# Altium PCB touch_control_165.PcbDoc
Units mm, origin at the board's own origin, x right, y up, seen from the top; angles counter-clockwise.
Board outline 165 x 20 mm, 4 copper layers (Top Layer, Int1 (Guard), Int2 (PWR), Bottom Layer), stack 1.573 mm thick; 25 components, 27 nets, 112 pads, 77 vias.
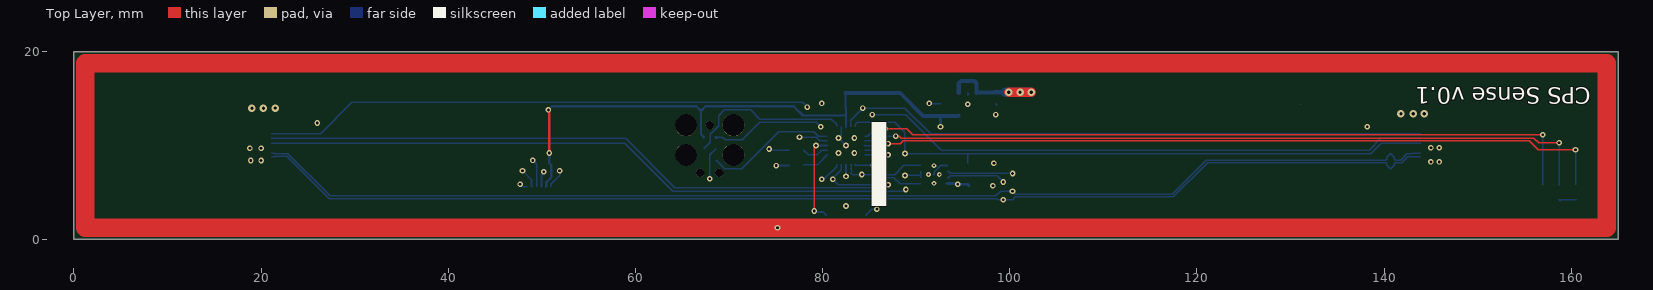
[diagram p0: Top Layer view]
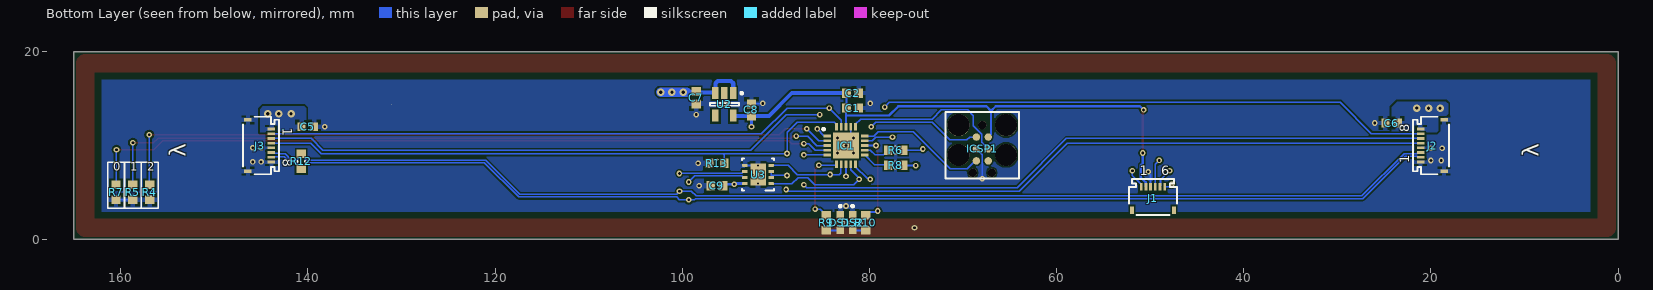
[diagram p1: Bottom Layer view, seen from below]
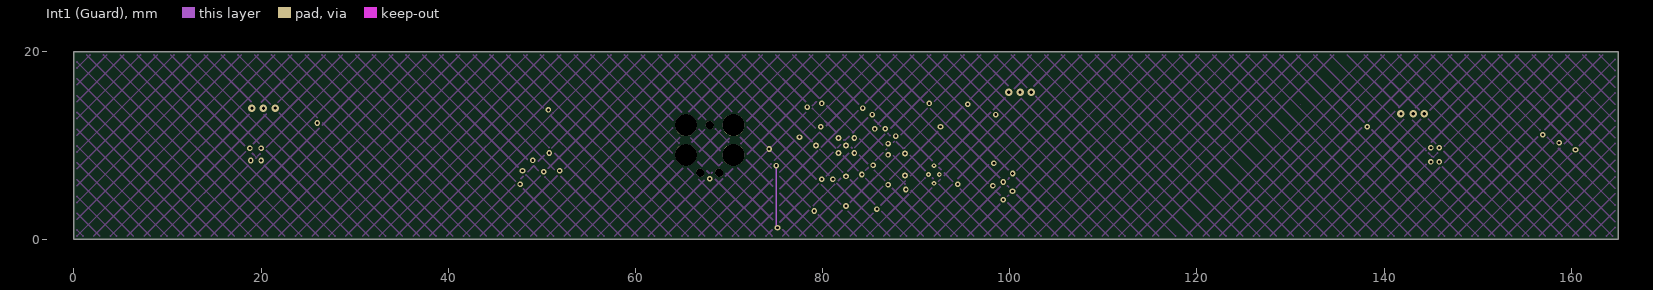
[diagram p2: Int1 (Guard)]
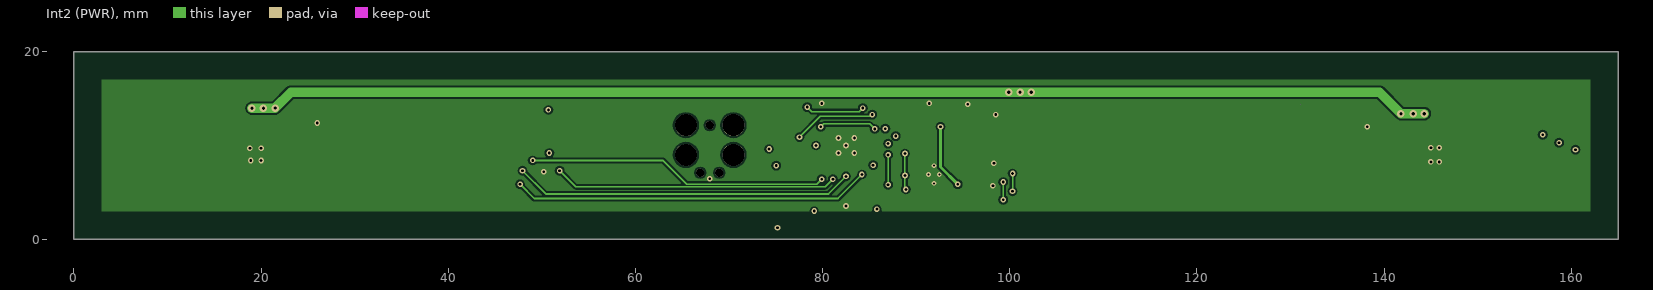
[diagram p3: Int2 (PWR)]

## Layer stack, top to bottom
Top Solder: solder mask 0.0254, SM-001, Dk 4
Top Layer: signal copper 0.035
Dielectric 1: prepreg 0.1803, PP-021, Dk 4.7
Dielectric 2: prepreg 0.1803, PP-021, Dk 4.7
Int1 (Guard): signal copper 0.035
Dielectric 3: core 0.7112, Core-039, Dk 4.8
Int2 (PWR): signal copper 0.035
Dielectric 4: prepreg 0.1803, PP-021, Dk 4.7
Dielectric 5: prepreg 0.1803, PP-021, Dk 4.7
Bottom Layer: signal copper 0.035
Bottom Solder: solder mask 0.0254, SM-001, Dk 4

## Board outline
0,0 165,0 165,20 0,20
cut-out: 131.1,14.4

## Design rules (kind name [scope] priority, off if disabled: settings)
BoardOutlineClearance [All] p1: gap=0.2 ignorepadtopadclearanceinfootprint=FALSE except(0.4: Arc-SplitBarrior Arc-SplitContinuation Track-SplitBarrior Track-SplitContinuation SMDPad-SplitBarrior SMDPad-SplitContinuation THPad-SplitBarrior THPad-SplitContinuation Via-SplitBarrior Via-SplitContinuation Fill-SplitBarrior Fill-SplitContinuation Poly-SplitBarrior Poly-SplitContinuation Region-SplitBarrior Region-SplitContinuation Text-SplitBarrior Text-SplitContinuation)
Clearance Clearance_1 [All] p1: gap=0.2 ignorepadtopadclearanceinfootprint=TRUE except(0.089: Arc-Arc Arc-Track Arc-SMDPad Track-Track Track-SMDPad SMDPad-SMDPad; 0.254: Arc-Text Track-Text SMDPad-Text THPad-Text Via-Text Fill-Text Poly-Text Region-Text Text-Text)
DiffPairsRouting RS485 [InDifferentialPair('RS485')] p1: maxlimit=0.127 minlimit=0.127 mostfreqgap=0.127 toplayer_minwidth=0.157 toplayer_maxwidth=0.589 toplayer_prefwidth=0.157 midlayer1_minwidth=0.063 midlayer1_maxwidth=0.343 midlayer1_prefwidth=0.063 midlayer2_minwidth=0.063 midlayer2_maxwidth=0.343 midlayer2_prefwidth=0.063 bottomlayer_minwidth=0.157 bottomlayer_maxwidth=0.589 bottomlayer_prefwidth=0.157 impedanceprofiledriven=TRUE impedanceprofileid={A137A21B-FC63-43BB-B182-D2C5AB81EC2A} impedanceprofilevalue=100.000000 maxuncoupledlength=12.7
DiffPairsRouting [All] p2: maxlimit=0.254 minlimit=0.254 mostfreqgap=0.254 toplayer_minwidth=0.381 toplayer_maxwidth=0.381 toplayer_prefwidth=0.381 midlayer1_minwidth=0.381 midlayer1_maxwidth=0.381 midlayer1_prefwidth=0.381 midlayer2_minwidth=0.381 midlayer2_maxwidth=0.381 midlayer2_prefwidth=0.381 bottomlayer_minwidth=0.381 bottomlayer_maxwidth=0.381 bottomlayer_prefwidth=0.381 maxuncoupledlength=12.7
HoleSize [All] p1: absolutevalues=TRUE maxlimit=6.3 minlimit=0.2 maxpercent=80.000 minpercent=20.000
MinimumAnnularRing [All] p1: minimumring=0.076
MinimumSolderMaskSliver [All] p1: minsoldermaskwidth=0.1
PlaneConnect [All] p1: pad.planeconnectstyle=Relief pad.reliefexpansion=0.508 pad.reliefentries=4 pad.reliefconductorwidth=0.254 pad.reliefairgap=0.254 via.planeconnectstyle=Direct via.reliefexpansion=0.508 via.reliefentries=4 via.reliefconductorwidth=0.254 via.reliefairgap=0.254
PolygonConnect PolygonConnect_2 [InNet('GND') vs InNet('GND')] p1 off: thpad.connectstyle=Relief thpad.reliefconductorwidth=0.254 thpad.reliefentries=4 thpad.polygonreliefangle="90 Angle" thpad.airgapwidth=0.254 smdpad.connectstyle=Direct smdpad.reliefconductorwidth=0.254 smdpad.reliefentries=4 smdpad.polygonreliefangle="90 Angle" smdpad.airgapwidth=0.254 via.connectstyle=Direct via.reliefconductorwidth=0.254 via.reliefentries=4 via.polygonreliefangle="90 Angle" via.airgapwidth=0.254
PolygonConnect PolygonConnect_1 [All] p2: thpad.connectstyle=Relief thpad.reliefconductorwidth=0.508 thpad.reliefentries=4 thpad.polygonreliefangle="90 Angle" thpad.airgapwidth=0.254 smdpad.connectstyle=Relief smdpad.reliefconductorwidth=0.508 smdpad.reliefentries=4 smdpad.polygonreliefangle="90 Angle" smdpad.airgapwidth=0.254 via.connectstyle=Direct via.reliefconductorwidth=0.508 via.reliefentries=4 via.polygonreliefangle="90 Angle" via.airgapwidth=0.254
PolygonConnect [All] p3: connectstyle=Relief reliefconductorwidth=0.254 reliefentries=4 polygonreliefangle="90 Angle" airgapwidth=0.254
RoutingCorners [All] p1: cornerstyle=Round minsetback=2.54 maxsetback=2.54
RoutingVias [All] p1: holewidth=0.5 width=1 viastyle="Through Hole" minholewidth=0.2 minwidth=0.45 maxholewidth=1 maxwidth=2
SilkToSilkClearance [All] p1: silktosilkclearance=0.1
SilkToSolderMaskClearance [IsPad] p1: minsilkscreentomaskgap=0.1 clearancetoexposedcopper=TRUE
SolderMaskExpansion [All] p1: expansion=0.102
Width C_SENSE_WIDTH [InNetClass('CS[0..5]')] p1: maxlimit=0.2 minlimit=0.1 preferedwidth=0.18
Width [All] p2: maxlimit=2.54 minlimit=0.089 preferedwidth=0.381
23 further rules are at their usual default settings.

## Classes and differential pairs
differential pair RS485: +RS485_P -RS485_N

## Components (designator, comment, footprint, x,y, rotation, side; value= is the part's Value field where it differs from the comment)
C1 "1uF" CAPC1608X95X40NL15T15 81.8,14 r0 bottom
C2 "0.1uF" CAPC1608X95X40NL15T15 81.8,15.6 r0 bottom
C5 "10uF" CAPC1608X90X35NL10T15 140,12 r0 bottom
C6 "10uF" CAPC1608X90X35NL10T15 24.2,12.4 r180 bottom
C7 "1uF" CAPC1608X95X40NL15T15 98.5,15.1 r90 bottom
C8 "1uF" CAPC1608X95X40NL15T15 92.6,13.8 r270 bottom
C9 "0.1uF" CAPC1608X95X40NL15T15 96.3,5.7 r180 bottom
DS1 "APG1608SURKC/T" KING-LED0603-25-RED_V 83.1,1.75 r90 bottom
DS2 "APG1608SURKC/T" KING-LED0603-25-RED_V 81.8,1.75 r90 bottom
IC1 "PIC16LF1559-I_GZ" QFN50P400X400X55-21N-D 82.5,10 r180 bottom
ICSP1 "ICSP PIC" TC2030-MCP 67.935,12.17 r270 bottom
J1 "687106182122" 687106182122 49.7,4.5 r180 bottom
J2 "687108182122" 687108182122 20,10 r90 bottom
J3 "687108182122" 687108182122 145,10 r270 bottom
R4 "10K" RESC0603(1608)_N 156.9,5 r270 bottom value="10000.00 Ohm"
R5 "10K" RESC0603(1608)_N 158.7,5 r270 bottom value="10000.00 Ohm"
R6 "10K" RESC0603(1608)_N 77.2,9.5 r180 bottom value="10000.00 Ohm"
R7 "10K" RESC0603(1608)_N 160.5,5 r270 bottom value="10000.00 Ohm"
R8 "10K" RESC0603(1608)_N 77.2,7.9 r180 bottom value="10000.00 Ohm"
R9 "1K" RESC0603(1608)_N 84.6,1.75 r270 bottom value="10000.00 Ohm"
R10 "1K" RESC0603(1608)_N 80.4,1.75 r270 bottom value="10000.00 Ohm"
R12 "100R" RESC0603(1608)_N 140.7,8.3 r270 bottom value="10000.00 Ohm"
R13 "10K" RESC0603(1608)_N 96.3,8.1 r0 bottom value="10000.00 Ohm"
U2 "MCP1801T-3302I/OT" SOT-23-OT5_M 95.5,14.4 r270 bottom
U3 "SN65HVD75DRBT" DRB0008B_V 91.9,6.9 r0 bottom

## Footprints (in the part's own frame and the unit in brackets; to place one, negate y for a bottom-side part, rotate by r counter-clockwise, add the part's x,y. Pads: shape width x height; smd on the part's side, far side on the other; paste and mask are expansions set on the pad)
687106182122 [mm] "ZIF Connectors, Horizontal, Dual Contact Back Locking, pitch 0.5mm, 6p"
  rect 0.3x0.8 smd: 1(-1.25,1.1) 2(-0.75,1.1) 3(-0.25,1.1) 4(0.25,1.1) 5(0.75,1.1) 6(1.25,1.1)
  rect 0.4x0.8 smd: MP1(-2.25,-1.4) MP2(2.25,-1.4)
  silkscreen extent -2.57,-1.92 2.58,1.92, body extent -2.5,-1.85 2.5,1.85, height 0.98
687108182122 [mm] "ZIF Connectors, Horizontal, Dual Contact Back Locking, pitch 0.5mm, 8p"
  rect 0.3x0.8 smd: 1(-1.75,1.1) 2(-1.25,1.1) 3(-0.75,1.1) 4(-0.25,1.1) 5(0.25,1.1) 6(0.75,1.1) 7(1.25,1.1) 8(1.75,1.1)
  rect 0.4x0.8 smd: MP1(-2.75,-1.4) MP2(2.75,-1.4)
  silkscreen extent -3.07,-1.92 3.08,1.92, body extent -3,-1.85 3,1.85, height 0.98
CAPC1608X90X35NL10T15 [mm] "Chip Capacitor, 2-Leads, Body 1.60x0.80mm, IPC Medium Density"
  rect 0.85x0.95 smd: 1(-0.675,0) 2(0.675,0)
  body extent -0.85,-0.45 0.85,0.45, height 0.9
CAPC1608X95X40NL15T15 [mm] "Chip Capacitor, 2-Leads, Body 1.60x0.80mm, IPC Medium Density"
  rect 0.95x1 smd: 1(-0.65,0) 2(0.65,0)
  body extent -0.88,-0.48 0.87,0.47, height 0.95
DRB0008B_V [mm] "SON, 8-Leads, Body 3x3mm, Pitch 0.65mm, Thermal Pad 2.4x1.65mm, TI Recommended"
  rrect33% 0.6x0.3 smd: 1(-1.4,0.975) 2(-1.4,0.325) 3(-1.4,-0.325) 4(-1.4,-0.975) 5(1.4,-0.975) 6(1.4,-0.325) 7(1.4,0.325) 8(1.4,0.975)
  rrect6% 1.65x2.4 smd paste-1.2: 9(0,0)
  silkscreen extent -1.73,-1.73 1.73,1.73, body extent -1.5,-1.5 1.5,1.5, height 0.96
KING-LED0603-25-RED_V [mm] "LED, SMT, Body 1.6x0.8mm, 0.28mm Thickness, Red"
  rect 0.8x0.8 smd paste+0: 1(-0.825,0) 2(0.825,0)
  silkscreen extent -0.2,-0.4 1.9,0.4, body extent -0.8,-0.4 0.8,0.4, height 0.28
QFN50P400X400X55-21N-D [mm]
  rect 0.8x0.3 smd: 1(-2,1) 2(-2,0.5) 3(-2,0) 4(-2,-0.5) 5(-2,-1) 11(2,-1) 12(2,-0.5) 13(2,0) 14(2,0.5) 15(2,1)
  rect 0.3x0.8 smd: 6(-1,-2) 7(-0.5,-2) 8(0,-2) 9(0.5,-2) 10(1,-2) 16(1,2) 17(0.5,2) 18(0,2) 19(-0.5,2) 20(-1,2)
  rect 2.8x2.8 smd: 21(0,0)
  silkscreen extent -2.53,1.63 -2.28,1.87, body extent -2.05,-2.05 2.05,2.05, height 0.55
RESC0603(1608)_N [mm] "Chip Resistor, Body 1.6x0.8mm, IPC Medium Density"
  rect 0.9x1 smd: 1(-0.8,0) 2(0.8,0)
  silkscreen extent -0.05,-0.4 0.05,0.4, body extent -0.85,-0.47 0.85,0.47, height 0.6
SOT-23-OT5_M [mm] "SOT23, 5-Leads, Body 2.9x1.7mm, Pitch 0.95mm, Lead Span 2.8mm, IPC Low Density"
  rect 1.3x0.7 smd: 1(-1.2,0.95) 2(-1.2,0) 3(-1.2,-0.95) 4(1.2,-0.95) 5(1.2,0.95)
  silkscreen extent -1.32,-1.55 0.15,1.97, body extent -0.9,-1.55 0.9,1.55, height 1.45
TC2030-MCP [mil]
  round 31 smd: 1(50,-25) 2(50,25) 3(100,-25) 4(100,25) 5(150,-25) 6(150,25)
  round 34 hole 35 unplated: A(0,0) B(200,40) C(200,-40)
  round 92 hole 93 unplated: D(0,-100) E(125,-100) F(0,100) G(125,100)
  silkscreen extent -55,-155 225,155

## Part data
C1 C7 C8: library part CMP-2006-00046-1, Manufacturer=Vitramon, Part Number=VJ0603G105KXYCW1BC
C2 C9: library part CMP-2006-01884-1, Manufacturer=Vitramon, Part Number=VJ0603Y104JXQCW1BC
C5 C6: library part CMP-2006-02792-1, Manufacturer=Murata, Part Number=GRM188R60J106ME47D
DS1 DS2: library part CMP-0404-00004-1, "Ultra Thin Hyper Red SMD Chip LED Lamp, 2 to 2.5 V, -40 to 85 degC, Body 1.6 x 0.8 mm, 0.28 mm Thickness, RoHS, Tape and Reel", Forward Voltage="2 to 2.5 V", Manufacturer=Kingbright, Operating Temperature="-40 to 85 degC", ComponentLink1Description="Manufacturer URL", ComponentLink1URL=http://www.kingbrightusa.com/, ComponentLink2Description=Datasheet, ComponentLink2URL=http://www.kingbrightusa.com/images/catalog/SPEC/APG1608SURKC-T.pdf, ComponentLink3Description="Package Specification", ComponentLink3URL=http://www.kingbrightusa.com/images/catalog/SPEC/APG1608SURKC-T.pdf, DatasheetVersion="Rev. V.5A", Dice="Hyper Red (AlGaInP)", IR (Max)="10 uA", Lens Type="Water Clear", Luminous Intensity mcd @ 20 mA (Min.)=55, Luminous Intensity mcd @ 20 mA (Typ.)=110, Mounting Technology="Surface Mount", PackageDescription="2-Pin SMT, Body 1.6 x 0.8 mm, 0.28mm Thickness, Red", PackageReference=LED0603-25-RED, PackageVersion="Rev. V.5A", Packing="Tape and Reel", PartNumber=APG1608SURKC/T, RoHS=TRUE, Viewing Angle=120
IC1: "Integrated Circuit", Manufacturer_Name=Microchip, Manufacturer_Part_Number=PIC16LF1559-I/GZ, Mouser Part Number=579-PIC16LF1559-I/GZ, Datasheet Link=http://ww1.microchip.com/downloads/en/DeviceDoc/40001761E.pdf, Height=0.55mm, Mouser Price/Stock=https://www.mouser.com/Search/Refine.aspx?Keyword=579-PIC16LF1559-I%2FGZ
J1: library part CMP-1502-01645-1, "SMT ZIF Connectors WR-FPC, Horizontal, Back Locking Dual Contact, pitch 0.5 mm, 6 pins", Contact Resistance=30mOhm, Manufacturer="Wurth Elektronik", Operating Temperature=-55to85degC, Rated Current=0.5A, Withstanding Voltage=250VAC, Working Voltage=50VAC, Contact Design=BackLockingDualContact, Datasheet URL=https://katalog.we-online.de/em/datasheet/687106182122.pdf, Manufacturer URL=http://www.we-online.de, Mounting Technology=SMT, Orientation=Horizontal, Package Reference=687106182122, Packaging=TapeandReel, Part Number=687106182122, Pin Number=6, Pitch=0.5mm, Publisher=WurthElektronik
J2 J3: library part CMP-1502-01646-1, "SMT ZIF Connectors WR-FPC, Horizontal, Back Locking Dual Contact, pitch 0.5 mm, 8 pins", Contact Resistance=30mOhm, Manufacturer="Wurth Elektronik", Operating Temperature=-55to85degC, Rated Current=0.5A, Withstanding Voltage=250VAC, Working Voltage=50VAC, Contact Design=BackLockingDualContact, Datasheet URL=https://katalog.we-online.de/em/datasheet/687108182122.pdf, Manufacturer URL=http://www.we-online.de, Mounting Technology=SMT, Orientation=Horizontal, Package Reference=687108182122, Packaging=TapeandReel, Part Number=687108182122, Pin Number=8, Pitch=0.5mm, Publisher=WurthElektronik
R4 R5 R6 R7 R8 R9 R10 R12 R13: library part CMP-1012-00623-1, "10K 0.1W 1% 0603 (1608 Metric)  SMD", Case-EIA=0603, Case-Metric=1608, Power="0.1 W", Tolerance="1 %", Technology=SMT
U2: library part CMP-0136-00719-1, "150 mA, High PSRR, Low Quiescent Current LDO, 5-Pin SOT-23, Industrial Temperature, Tape and Reel", Code_IPC=SOT23-5, DatasheetVersion="revC, Jan-2009", PackageDescription="5-Lead Plastic Small Outline Transistor (OT) [SOT-23]", PackageReference=SOT-23-OT5, PackageVersion="revBB, Aug-2009"
U3: library part CMP-0694-00015-2, "3.3 V Supply RS-485 with IEC ESD Protection, 20 Mbps, -40 to 125 degC, 8-Pin SON, RoHS, Tape and Reel", Manufacturer="Texas Instruments", Operating Temperature Range="-40 to 125 degC", ComponentLink1Description="Manufacturer URL", ComponentLink1URL=http://www.ti.com/, ComponentLink2Description=Datasheet, ComponentLink2URL=http://www.ti.com/lit/ds/sllse11c/sllse11c.pdf, ComponentLink3Description="Package Specification", ComponentLink3URL=http://www.ti.com/lit/ds/sllse11c/sllse11c.pdf, DatasheetVersion=SLLSE11C, ESD="15 kV", ICC (Max) (mA)=0.95, Mounting Technology="Surface Mount", No. of RX=1, No. of TX=1, PackageDescription="8-Pin Plastic Small Outline No-Lead, Body 3 x 3 mm, Pitch 0.65 mm", PackageReference=DRB0008B, PackageVersion=4203482-2/K, Packing="Tape and Reel", PartNumber=SN65HVD75DRBT, RoHS=TRUE, Signaling Rate (Max) (Mbps)=20, VCC="3 to 3.6 V", VI="-7 to 12 V"

## Via types
v1: diameter 0.6, hole 0.3, Top Layer to Bottom Layer, 64 vias
v2: diameter 0.8, hole 0.35, Top Layer to Bottom Layer, 9 vias
v3: diameter 0.5, hole 0.2, Top Layer to Bottom Layer, 4 vias

## Nets (pads, with @x,y where several pads share a name; then routed paths per layer and width w, separated by ;. In a path a pad name is that pad's centre, name@x,y a point inside that pad or via, vN(x,y) a via of type N, cw(c..) or ccw(c..) an arc to the next point about the centre after c; other vN are vias at no path point)
+5: C5.2 C6.2 C7.2 J2.8 J3.1 U2.1 U2.3 | length 139.5
  Top Layer w1: v2(99.9,15.7) v2(101.1,15.7) v2(102.3,15.7)
  Int2 (PWR) w1: v2(19.018,13.983) v2(20.25,13.983) 21.483,13.983 v2(21.5,14) 23.2,15.7 v2(99.9,15.7) v2(101.1,15.7) v2(102.3,15.7) 139.5,15.7 v2(141.8,13.4) v2(143.1,13.4) v2(144.3,13.4)
  Bottom Layer w0.457: U2.1 94.55,16.65 94.8,16.9 96.2,16.9 96.45,16.65 U2.3 96.525,15.675 98.425,15.675 C7.2 98.55,15.7 v2@99.5,15.7
  Bottom Layer w1: v2@99.5,15.7 v2(99.9,15.7) v2(101.1,15.7) v2(102.3,15.7)
CS0: IC1.11 R8.1 | length 3
  Bottom Layer w0.18: R8.1 78,7.95 79.45,7.95 IC1.11
CS0_S: R8.2 | length 368.5
  Top Layer w2: 1.2,1.2 163.8,1.2 163.8,18.8 1.2,18.8 1.2,1.2
  Int1 (Guard) w0.187: v1(75.044,7.85) 75.044,1.356 v1(75.179,1.221)
  Bottom Layer w0.187: v1(75.044,7.85) 76.4,7.85 R8.2
GND: C1.1 C2.1 C5.1 C6.1 C7.1 C8.1 C9.1 DS1.2 DS2.2 IC1.17 IC1.21 ICSP1.3 J1.3 J2.1 J2.4 J2.MP1 J2.MP2 J3.5 J3.8 J3.MP1 J3.MP2 R4.2 R5.2 R7.2 R13.2 U2.2 U3.5 U3.9 | length 13.1
  Bottom Layer w0.178: v1(67.935,6.455) 67.935,8.995 ICSP1.3
  Bottom Layer w0.187: v1(20,9.7) v1@20.05,9.75 ; J1.3 49.95,6.838 50.121,7.009 v1@50.121,7.277 ; v1@50.11,7.288 v1@50.121,7.277 ; v1(50.2,7.2) 50.198,7.2 v1@50.121,7.277 ; IC1.17 82,10.5 v1(82.5,10) ; v1(91.4,14.5) 91.5,14.5 91.55,14.45 C8.1 ; U3.9 91.9,7.143 92.632,7.875 U3.5 ; U2.2@95.5,15.4 95.6,15.5 U2.2 ; C7.1 C7.1@98.615,14.335 ; R5.2@158.8,4.1 R5.2 R7.2
  other v1: 82.5,3.531 98.2,5.7 98.3,8.1 145,8.25 145.9,8.25 18.9,8.4 20,8.4 81.7,9.2 83.4,9.2 18.8,9.7 145,9.75 145.9,9.75 81.7,10.8 83.4,10.8 138.2,12 26,12.4 98.5,13.3 95.5,14.4 79.9,14.5
  other v3: 91.9,5.95 91.325,6.9 92.475,6.9 91.9,7.85
GPIO0: IC1.19 J2.7 J3.2 | length 128.4
  Int2 (PWR) w0.157: v1(78.357,14.1) 78.836,13.621 83.921,13.621 v1(84.3,14)
  Bottom Layer w0.157: J2.7 26.35,11.25 29.7,14.6 77.857,14.6 v1(78.357,14.1) ; IC1.19 83,12.7 v1(84.3,14) 88.8,14 91.55,11.25 J3.2
GUARD: IC1.12 R6.1 | length 2.9
  Bottom Layer w0.18: R6.1 78.5,9 79.4,9 79.9,9.5 IC1.12
GUARD_S: R6.2 | length 2.2
  Bottom Layer w0.18: v1(74.281,9.623) 74.404,9.5 R6.2
M\C\L\R\/VPP: IC1.1 ICSP1.1 | length 20
  Int2 (PWR) w0.157: v1(79.8,12) 80.1,12.3 85.041,12.3 v1(85.57,11.77)
  Bottom Layer w0.157: ICSP1.1 69.3,10.9 69.6,10.6 71.4,10.6 73.3,12.5 79.3,12.5 v1(79.8,12) ; IC1.1 84.8,11 v1(85.57,11.77)
  Bottom Layer w0.254: ICSP1.1 ICSP1.1@68.672,10.798
NetDS1_1: DS1.1 R9.2 | length 1.5
  Bottom Layer w0.187: DS1.1 84.575,0.925 R9.2
NetDS2_1: DS2.1 R10.2 | length 1.4
  Bottom Layer w0.187: R10.2 80.425,0.925 DS2.1
NetIC1_6: IC1.6 R9.1 | length 8.3
  Top Layer w0.187: v1(85.4,7.9) 85.8,7.5 v1(85.8,3.2)
  Bottom Layer w0.187: IC1.6 83.5,7.956 83.557,7.9 v1(85.4,7.9) ; R9.1 85.25,3.2 v1(85.8,3.2)
NetIC1_13: IC1.13 R10.1 | length 9.8
  Top Layer w0.187: v1(79.1,3) 79.1,9.688 79.3,9.888 v1(79.3,10)
  Bottom Layer w0.187: v1(79.1,3) 79.212,3 79.305,2.906 80.043,2.906 R10.1 ; v1(79.3,10) IC1.13
PGC: IC1.15 ICSP1.5 | length 14.1
  Bottom Layer w0.157: ICSP1.5 68.704,8.36 69.528,7.535 71.375,7.535 75.313,11.474 79.074,11.474 79.548,11 IC1.15
PGD: IC1.16 ICSP1.4 | length 18
  Bottom Layer w0.157: ICSP1.4 68.009,10.339 68.009,11.221 68.9,12.112 68.9,13.2 69.5,13.8 72.3,13.8 73.3,12.8 80.95,12.8 81.5,12.25 IC1.16
RS485_N: J2.3 J3.6 R12.1 U3.6 | length 136.8
  Int2 (PWR) w0.157: v1@100.287,5.233 v1(100.287,5.113) 100.293,5.12 100.293,6.495 100.3,6.502 v1(100.3,7.012)
  Bottom Layer w0.157: J2.3 21.171,9.179 21.477,9.179 21.514,9.142 22.86,9.142 27.381,4.621 98.517,4.621 99.009,5.113 v1(100.287,5.113) 100.608,4.792 117.362,4.792 121.012,8.442 140.186,8.442 140.279,8.534 140.279,8.729 140.65,9.1 R12.1 141.071,8.729 141.071,8.534 141.164,8.442 141.755,8.442 142.415,9.102 143.017,9.102 143.097,9.182 143.832,9.182 J3.6 ; U3.6 93.45,7.225 93.521,7.154 93.521,7.134 93.614,7.042 100.269,7.042 v1(100.3,7.012)
RS485_P: J2.2 J3.7 R12.2 U3.7 | length 135.9
  Int2 (PWR) w0.157: v1@99.3,4.1 v1(99.3,4.2) v1(99.3,6.1)
  Bottom Layer w0.157: J2.2 21.171,8.821 21.477,8.821 21.514,8.858 22.742,8.858 27.263,4.337 98.563,4.337 98.7,4.2 v1(99.3,4.2) 100.3,4.2 100.608,4.508 117.48,4.508 121.13,8.158 140.186,8.158 140.279,8.066 140.279,7.871 140.65,7.5 R12.2 141.071,7.871 141.071,8.066 141.164,8.158 141.873,8.158 142.533,8.818 143.832,8.818 J3.7 ; U3.7 93.45,6.575 93.521,6.646 93.521,6.666 93.614,6.758 98.662,6.758 99.3,6.12 v1(99.3,6.1)
RTS: IC1.20 J2.5 J3.4 R13.1 U3.2 U3.3 | length 141.5
  Int2 (PWR) w0.157: v1(88.8,9.141) v1(88.8,6.8) 88.8,5.4 v1(88.9,5.3)
  Bottom Layer w0.157: J2.5 58.85,10.25 64,5.1 88.7,5.1 v1(88.9,5.3) ; IC1.20 83.5,12.25 83.75,12.5 87.7,12.5 88.8,11.4 v1(88.8,9.141) 88.8,9 88.9,9.1 95.6,9.1 ; v1(88.8,6.8) 90.4,6.8 90.5,6.9 ; U3.2 90.5,6.9 ; U3.3 90.5,6.9 ; R13.1 95.5,9 95.6,9.1 ; J3.4 139.698,10.25 138.548,9.1 95.6,9.1
RX: IC1.9 J1.1 U3.1 | length 44.5
  Int2 (PWR) w0.187: v1(51.9,7.3) 53.614,5.586 80.286,5.586 v1(81.1,6.4)
  Bottom Layer w0.157: v1(81.1,6.4) 81.679,5.821 85.855,5.821 86.613,6.579 87.621,6.579 88.275,5.925 U3.1 ; v1@81.1,6.5 82,7.4 IC1.9
  Bottom Layer w0.187: J1.1 50.95,5.85 51.9,6.8 v1(51.9,7.3) ; v1(81.1,6.4) v1@81.1,6.5
SCL_SY: IC1.8 J1.5 | length 39.8
  Int2 (PWR) w0.187: v1(47.932,7.3) 50.408,4.824 80.624,4.824 v1(82.5,6.7)
  Bottom Layer w0.187: v1(47.932,7.3) 48.893,6.339 48.893,5.657 J1.5 ; v1(82.5,6.7) IC1.8
SDA_SX: IC1.10 J1.4 | length 37.5
  Int2 (PWR) w0.187: v1(49.029,8.405) 62.924,8.405 65.467,5.862 79.362,5.862 v1(79.9,6.4)
  Bottom Layer w0.157: v1(49.029,8.405) 49.45,7.984 J1.4 ; v1(79.9,6.4) 79.985,6.485 80.235,6.485 81.5,7.75 IC1.10
SEL0: IC1.2 R4.1 | length 78.6
  Top Layer w0.157: v1(86.7,11.8) 89,11.8 89.65,11.15 v1(156.95,11.15)
  Bottom Layer w0.157: IC1.2 85.4,10.5 v1(86.7,11.8) ; R4.1 156.95,5.85 v1(156.95,11.15)
SEL1: IC1.3 R5.1 | length 79.5
  Top Layer w0.157: v1(87.81,11) 88.2,11 88.4,10.8 156,10.8 156.5,10.3 v1(158.7,10.3)
  Bottom Layer w0.157: IC1.3 85.6,10 86.6,11 v1(87.81,11) ; R5.1 v1(158.7,10.3)
  Bottom Layer w0.187: IC1.3 IC1.3@84.521,9.979 ; R5.1 R5.1@158.75,5.8
SEL2: IC1.4 R7.1 | length 80.5
  Top Layer w0.157: v1(87,10.2) 88.3,10.2 88.6,10.5 155.5,10.5 156.45,9.55 v1(160.45,9.55)
  Bottom Layer w0.157: IC1.4 85.8,9.5 86.5,10.2 v1(87,10.2) ; v1(160.45,9.55) 160.45,5.85 R7.1
SigIn0: IC1.14 J3.3 | length 72.6
  Int2 (PWR) w0.157: v1(77.529,10.895) 79.734,13.1 85.1,13.1 v1(85.3,13.3)
  Bottom Layer w0.157: v1(77.529,10.895) 79.305,10.895 79.7,10.5 IC1.14 ; v1(85.3,13.3) 88.9,13.3 92.7,9.5 138.4,9.5 139.65,10.75 J3.3
SigOut0: IC1.5 J2.6 | length 73.9
  Int2 (PWR) w0.157: v1(87,5.8) v1(87,9)
  Bottom Layer w0.157: J2.6 58.95,10.75 64.2,5.5 86.7,5.5 v1(87,5.8) ; IC1.5 v1(87,9)
TX: IC1.7 J1.6 U3.4 | length 48
  Int2 (PWR) w0.187: v1(47.675,5.85) 49.191,4.334 81.634,4.334 v1(84.2,6.9)
  Bottom Layer w0.157: IC1.7 83.071,7.929 83.071,7.029 83.2,6.9 v1(84.2,6.9) 87.7,6.9 88.675,7.875 U3.4
  Bottom Layer w0.187: v1(47.675,5.85) 47.925,5.6 J1.6
VCC: C1.2 C2.2 C8.2 C9.2 IC1.18 ICSP1.2 J1.2 U2.5 U3.8 | length 71.5
  Top Layer w0.254: v1(50.7,13.8) 50.8,13.7 v1(50.8,9.2)
  Int2 (PWR) w0.305: v1(92.6,12) 92.6,7.7 v1(94.438,5.863)
  Bottom Layer w0.254: J1.2 50.473,5.623 50.473,6.063 51,6.59 51,7.9 50.8,8.1 v1(50.8,9.2) ; v1(50.7,13.8) 51.1,14.2 66.5,14.2 67,13.7 ; ICSP1.2 67,11.2 67,13.7 ; C2.2 C1.2 82.5,13.95 82.5,13.25 ; IC1.18 82.5,13.25 ; 67,13.7 67.5,14.2 76.9,14.2 77.9,13.2 82.45,13.2 82.5,13.25
  Bottom Layer w0.305: v1(92.6,12) C8.2 ; U3.8 94.295,5.925 94.358,5.863 v1(94.438,5.863) 95.488,5.863 C9.2
  Bottom Layer w0.406: C2.2 88.293,15.6 90.743,13.15 C8.2 94.5,13.15 U2.5
pads on no net: ICSP1.6 ICSP1.A ICSP1.B ICSP1.C ICSP1.D ICSP1.E ICSP1.F ICSP1.G J1.MP1 J1.MP2 U2.4

## Polygon pours and split planes (outlines as drawn)
GND on Bottom Layer "GND_L04_P011" (solid, pour order 11): 162,17 3,17 3,2.9 162,2.9
+5 on Bottom Layer "+5_L04_P006" (solid, pour order 6): 140.4,14.2 140.2,14 140.2,11.55 140.5,11.25 141.55,11.25 141.7,11.4 145.1,11.4 145.1,13.9 144.8,14.2
+5 on Bottom Layer "+5_L04_P008" (solid, pour order 8): 18.166,13.4 18.366,13.2 19.156,13.2 19.203,13.153 19.2,11.6 19.4,11.397 24.2,11.397 24.2,14.1 23.6,14.7 18.4,14.7 18.166,14.466
GND on Int2 (PWR) "GND_L03_P004" (solid, pour order 4): 162,17 162,3 3,3 3,17
GUARD_S on Int1 (Guard) "GUARD_S_L02_P002" (hatched 45Degree grid 1.27 track 0.18, pour order 2): 0,20 165,20 165,0 0,0

## Silkscreen, mask and mechanical layers (free items; w line width, h text height)
Top Overlay:
  text "CPS Sense v0.1" at 162.1,16.8 h3 r180
  text "I" at 88.4,16.3 h20 r180
Bottom Overlay:
  lines w0.18: 157.8,3.3 157.8,8.2 ; 159.6,3.3 156,3.3 156,8.2 159.6,8.2 ; 159.6,3.3 159.6,8.2 ; 159.6,3.3 161.4,3.3 161.4,8.2 159.6,8.2
  text "y" at 10.4,8.8 h3 r90
  text "y" at 155,8.8 h3 r90
  text "2" at 157.173,7 h1.52
  text "1" at 158.973,7 h1.52
  text "0" at 160.801,7 h1.52
ML2: Outline:
  the board outline again, w0.254

## Dimensions
145,10.5 to 165,0 on Mechanical 1
0,20 to 0,0 on Mechanical 1
0,20 to 165,20 on Mechanical 1

## Text inside footprints (layer, text, board x,y; h text height)
J1: Bottom Overlay "1" at 51.1,6.8 h1.02; Bottom Overlay "6" at 48.8,6.8 h1.02
J2: Bottom Overlay "8" at 22.3,11.4 h1.02 r270; Bottom Overlay "1" at 22.3,8.1 h1.02 r270
J3: Bottom Overlay "8" at 142.7,8.6 h1.02 r90; Bottom Overlay "1" at 142.7,11.9 h1.02 r90